# EAGLE board Meshtastic-DIY_v4_TTGO-T8-18 (EAGLE 9.6.2)
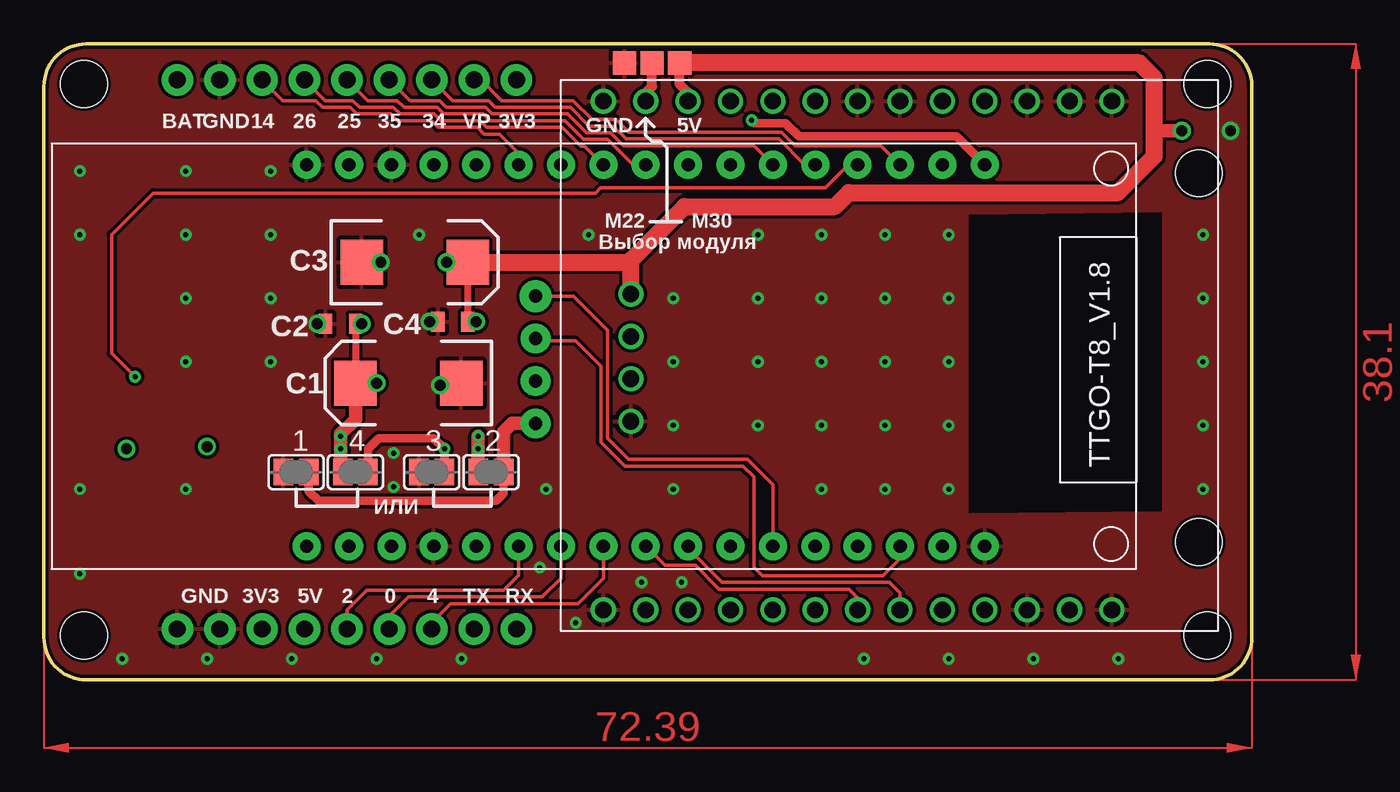
[diagram p0: board, top side]
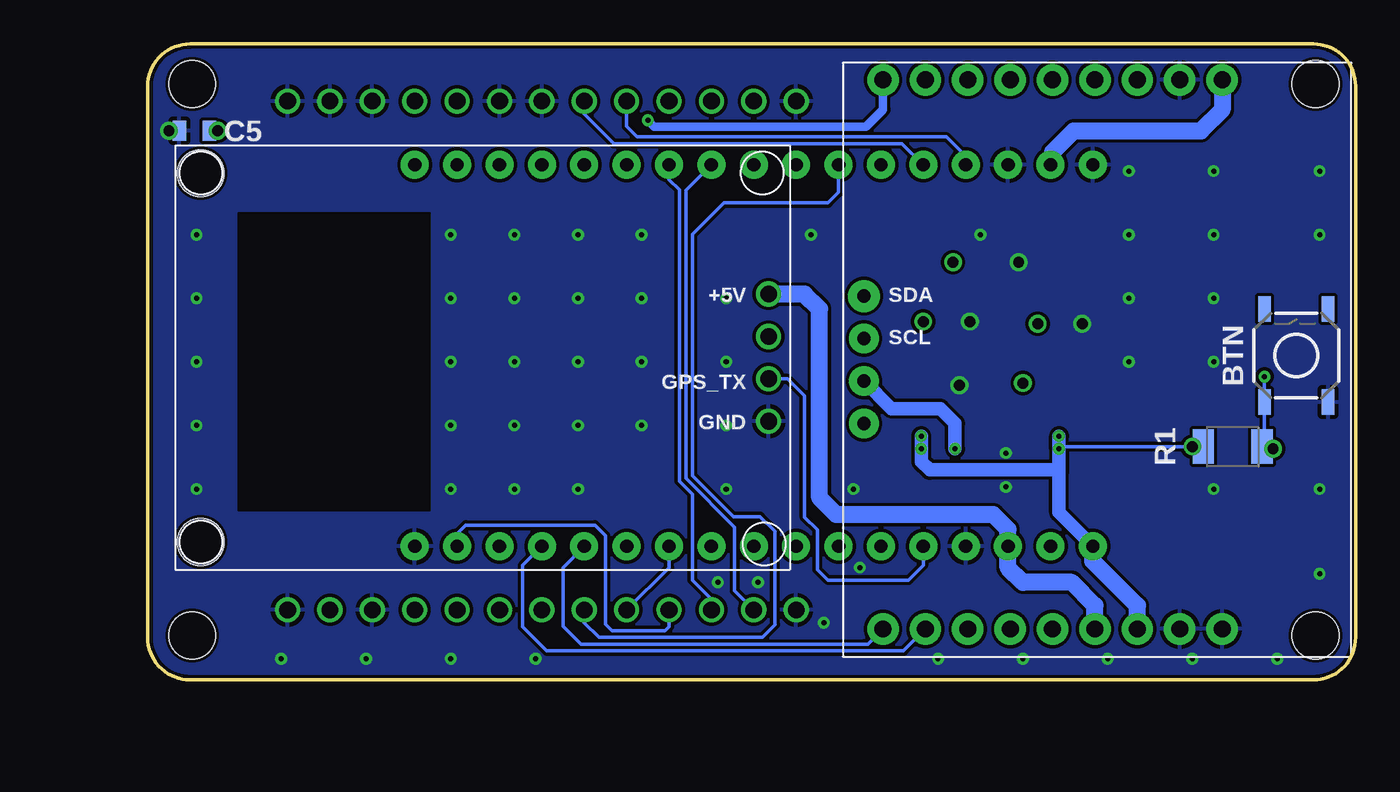
[diagram p1: board, bottom side, seen from below]

Size 72.39 x 38.1 mm. Coordinates in mm from the lower left corner, seen from the top.
Outline: 2.54,0 arc-90 0,2.54 0,35.56 arc-90 2.54,38.1 69.85,38.1 arc-90 72.39,35.56 72.39,2.54 arc-90 69.85,0 2.54,0
Copper layers (1*16): Top 0.035mm / dielectric 1.5mm / Bottom 0.035mm
Design rules "default *": minimum track width 0.2mm, minimum drill 0.25mm, track to track 0.2mm, track to pad 0.2mm, pad to pad 0.2mm, via to via 0.2mm, smd to smd 0.2mm, copper to edge 0.2mm, drill to drill 0.2mm, minimum pad ring 10mil, minimum via ring 8mil, stop-mask expansion 4mil, vias tented up to drill 0.35mm, thermal gap 10mil
Holes 2.8 mm at 69.22,8.26 69.22,30.35 69.72,35.69 69.72,2.67 2.41,35.69 2.41,2.67
tRestrict: area 55.5,10 to 66.9,27.9
bRestrict: 4 lines

## Footprints (pad centres in the part's own frame; a part is rotated, then mirrored left to right if it is on the bottom)
SJ = smd 1.168 x 1.6: 1 -0.762,0; 2 0.762,0
TACTILE_SWITCH_SMD_5.2MM = smd 1.524 x 0.762: 1 -2.794,1.905; 2 2.794,1.905; 3 -2.794,-1.905; 4 2.794,-1.905
EIA7343 = smd 2.55 x 2.7: A 3.17,0; C -3.17,0
0805 = smd 0.8 x 1.2: 1 -0.9,0; 2 0.9,0
1X09_NO_SILK = drill 1.016 pad 1.88: 1 0,0; 2 2.54,0; 3 5.08,0; 4 7.62,0; 5 10.16,0; 6 12.7,0; 7 15.24,0; 8 17.78,0; 9 20.32,0
1210 = smd 1.27 x 2.06: 1 -1.755,0; 2 1.755,0
TP14SQ = smd 1.4 x 1.4: TP 0,0
TTGO-T8_V18 = drill 0.8 pad 1.676: 0 24.13,-30.48; 2 24.13,-33.02; 3V3@1 1.27,-5.08; 3V3@2 24.13,-45.72; 4 24.13,-27.94; 5 24.13,-25.4; 5V@1 24.13,-40.64; 12 1.27,-35.56; 13 1.27,-38.1; 14 1.27,-33.02; 15 24.13,-35.56; 18 24.13,-22.86; 19 24.13,-20.32; 21 24.13,-17.78; 22 24.13,-10.16; 23 24.13,-7.62; 25 1.27,-25.4; 26 1.27,-27.94; 27 1.27,-30.48; 32 1.27,-20.32; 33 1.27,-22.86; 34 1.27,-15.24; 35 1.27,-17.78; BAT 1.27,-43.18; GND@1 1.27,-40.64; GND@2 1.27,-45.72; GND@3 24.13,-38.1; GND@4 24.13,-5.08; RST 1.27,-7.62; RXD 24.13,-15.24; TXD 24.13,-12.7; VIN 24.13,-43.18; VN 1.27,-12.7; VP 1.27,-10.16
1.3"OLED = drill 0.8 pad 1.778: GND 2.54,0; SCL 5.08,0; VCC 0,0 | drill 0.8 pad 1.9: SDA 7.62,0
E22-XXXMXXS = drill 1: P$1 -15.24,13.97; P$2 -15.24,11.43; P$3 -15.24,8.89; P$4 -15.24,6.35; P$5 -15.24,3.81; P$6 -15.24,1.27; P$7 -15.24,-1.27; P$8 -15.24,-3.81; P$9 -15.24,-6.35; P$10 -15.24,-8.89; P$11 -15.24,-11.43; P$12 -15.24,-13.97; P$13 -15.24,-16.51; P$14 15.24,-16.51; P$15 15.24,-13.97; P$16 15.24,-11.43; P$17 15.24,-8.89; P$18 15.24,-6.35; P$19 15.24,-3.81; P$20 15.24,-1.27; P$21 15.24,1.27; P$22 15.24,3.81; P$23 15.24,6.35; P$24 15.24,8.89; P$25 15.24,11.43; P$26 15.24,13.97
GPS-NEO = drill 1: P$1 -3.81,16.51; P$2 -1.27,16.51; P$3 1.27,16.51; P$4 3.81,16.51

## Placement (x,y rotation side)
1  [SJ]  15.11,12.45 0 top
2  [SJ]  26.8,12.45 0 top
3  [SJ]  23.24,12.45 0 top
4  [SJ]  18.67,12.45 0 top
BTN  MOMENTARY-SWITCH-SPST-SMD-5.2MM  [TACTILE_SWITCH_SMD_5.2MM]  3.56,19.43 90 bottom
C1  100uF  [EIA7343]  21.84,17.78 180 top
C2  100nF  [0805]  17.78,21.34 180 top
C3  100uF  [EIA7343]  22.23,25.02 0 top
C4  100nF  [0805]  24.51,21.46 180 top
C5  100nF  [0805]  69.6,32.89 180 bottom
J1  [1X09_NO_SILK]  8,3.05 0 top
J2  [1X09_NO_SILK]  8,35.94 0 top
R1  10k  [1210]  7.37,13.97 0 bottom
TP1  TPTP14SQ  [TP14SQ]  38.1,36.96 0 top
TP2  TPTP14SQ  [TP14SQ]  36.45,36.96 0 top
TP3  TPTP14SQ  [TP14SQ]  34.8,36.96 0 top
TTGO-T8_V1.8  [TTGO-T8_V18]  61.47,32.13 270 top
U$1  13"OLED13"OLED  [1.3"OLED]  29.46,15.37 90 bottom
U$2  E22-XXXMXXS  [E22-XXXMXXS]  50.04,19.43 270 top
U$3  GPS-NEO  [GPS-NEO]  51.69,19.3 270 bottom

## Library data of the parts
1-4 = jumper
BTN = SparkFun-Switches; PROD_ID: SWCH-08247; SF_SKU: COM-08720
C1 C3 = SparkFun-Capacitors; PROD_ID: CAP-07890
C2 C4 C5 = SparkFun-Capacitors; PROD_ID: CAP-08469
J1 J2 = SparkFun-Connectors
R1 = SparkFun-Resistors; PROD_ID: RES-12374
TP1-TP3 = testpad
TTGO-T8_V1.8 = TTGO-T8
U$1 U$3 = 13oled
U$2 = E22-XXXMXXS

## Nets
0: J1.6 TTGO-T8_V1.8.0
2: J1.5 TTGO-T8_V1.8.2
3V3: J2.9 TTGO-T8_V1.8.3V3@1
4: J1.7 TTGO-T8_V1.8.4
14: J2.3 TTGO-T8_V1.8.14
25: J2.5 TTGO-T8_V1.8.25
26: J2.4 TTGO-T8_V1.8.26
34: J2.7 TTGO-T8_V1.8.34
35: J2.6 TTGO-T8_V1.8.35
+3V3: 2.1 4.1 C1.A C2.1 J1.3 R1.1 TTGO-T8_V1.8.3V3@2
+5V: C3.A C4.1 C5.1 J1.4 TP1.TP TTGO-T8_V1.8.5V@1 U$2.P$11 U$3.P$1
ANT: U$2.P$25
BAT: J2.1 TTGO-T8_V1.8.BAT
BTN: BTN.1 R1.2 TTGO-T8_V1.8.VN
BUSY: TTGO-T8_V1.8.32 U$2.P$16
GND: 1.1 3.1 BTN.3 C1.C C2.2 C3.C C4.2 C5.2 J1.1 J1.2 J2.2 TP3.TP TTGO-T8_V1.8.GND@1 TTGO-T8_V1.8.GND@2 TTGO-T8_V1.8.GND@3 TTGO-T8_V1.8.GND@4 U$2.P$1 U$2.P$2 U$2.P$3 U$2.P$6 U$2.P$7 U$2.P$13 U$2.P$14 U$2.P$24 U$2.P$26 U$3.P$4
GPS_TX: TTGO-T8_V1.8.15 U$3.P$3
IRQ: TTGO-T8_V1.8.33 U$2.P$15
LCD_SCK: TTGO-T8_V1.8.22 U$1.SCL
LCD_SDA: TTGO-T8_V1.8.21 U$1.SDA
MISO: TTGO-T8_V1.8.19 U$2.P$18
MOSI: TTGO-T8_V1.8.27 U$2.P$19
N$1: U$2.P$10
N$2: 3.2 4.2 U$1.GND
N$3: U$3.P$2
N$4: 1.2 2.2 U$1.VCC
N$40: TTGO-T8_V1.8.VIN
NSS: TTGO-T8_V1.8.18 U$2.P$21
RST: TTGO-T8_V1.8.23 U$2.P$17
RST2: TTGO-T8_V1.8.RST
RXD: J1.9 TTGO-T8_V1.8.RXD
RXEN: TTGO-T8_V1.8.12 U$2.P$8
SCK: TTGO-T8_V1.8.5 U$2.P$20
TXD: J1.8 TTGO-T8_V1.8.TXD
TXEN: TTGO-T8_V1.8.13 U$2.P$9
VCC2: TP2.TP U$2.P$12
VP: J2.8 TTGO-T8_V1.8.VP

## Tracks (layer width: path | path; a pad name or v marks a point on that pad's centre or on a via)
0
  Top 0.2: TTGO-T8_V1.8.0 30.99,6.1 29.86,4.97 21.86,4.97 20.7,3.81 J1.6
2
  Top 0.2: TTGO-T8_V1.8.2 28.45,6.26 27.56,5.37 19.34,5.37 18.16,4.19 J1.5
3V3  (via drill 0.3)
  Top 0.508: v42.42,33.53 42.59,33.36 44.45,33.36 45.24,32.56 54.69,32.56 TTGO-T8_V1.8.3V3@1
  Bottom 0.508: v42.42,33.53 42.04,33.15 29.34,33.15 28.32,34.16 J2.9
4
  Top 0.2: TTGO-T8_V1.8.4 33.53,6.1 32,4.57 24.38,4.57 23.24,3.43 J1.7
14
  Top 0.2: TTGO-T8_V1.8.14 28.45,31.56 27.3,32.7 26.38,32.7 25.98,33.1 23.62,33.1 23.22,33.5 21.18,33.5 20.78,33.9 18.75,33.9 18.35,34.3 16.7,34.3 16.29,34.7 14.32,34.7 J2.3
25
  Top 0.2: TTGO-T8_V1.8.25 35.31,30.86 33.79,32.38 32.34,32.38 31.22,33.5 26.71,33.5 26.31,33.9 23.95,33.9 23.55,34.3 21.58,34.3 21.18,34.7 19.4,34.7 J2.5
26
  Top 0.2: TTGO-T8_V1.8.26 32.41,31.98 32.18,31.98 31.06,33.1 26.54,33.1 26.14,33.5 23.79,33.5 23.39,33.9 21.34,33.9 20.94,34.3 20.57,34.3 20.45,34.3 18.91,34.3 18.51,34.7 16.86,34.7 J2.4
34
  Top 0.2: TTGO-T8_V1.8.34 45.59,30.86 44.05,32.4 34.89,32.4 34.12,33.18 32.67,33.18 31.55,34.3 27.04,34.3 26.64,34.7 24.5,34.7 23.27,35.94 J2.7
35
  Top 0.2: TTGO-T8_V1.8.35 42.55,32 34.73,32 34.06,32.67 33.95,32.78 32.51,32.78 31.39,33.9 26.87,33.9 26.47,34.3 24.12,34.3 23.72,34.7 21.94,34.7 J2.6
+3V3  (via drill 0.3, 0.65)
  Top 0.254: v19.94,17.78 18.69,17.78 C1.A | C2.1 v19.05,21.34
  Top 0.406: C2.1 C1.A
  Top 0.813: 4.1 17.78,12.57 v17.78,14.61 17.78,14.73 18.67,15.63 C1.A | 2.1 v26.04,13.84 v26.04,14.61
  Bottom 0.2: R1.1 v9.78,13.97 17.65,13.97 v17.78,13.84
  Bottom 0.813: TTGO-T8_V1.8.3V3@2 17.78,10.03 17.78,12.45 | v17.78,14.61 v17.78,13.84 17.78,12.45 | 17.78,12.45 17.91,12.57 25.53,12.57 26.04,13.08 v26.04,14.61
  Bottom 1.016: J1.3 13.08,4.45 15.75,7.11 TTGO-T8_V1.8.3V3@2
+5V  (via drill 0.65)
  Top 0.254: v24.13,25.02 C3.A | v25.91,21.46 C4.1
  Top 0.406: C4.1 25.41,25 C3.A
  Top 0.61: U$2.P$11 38.61,35.18 38.1,35.69 TP1.TP
  Top 0.813: C3.A 25.52,25.15 | v68.2,32.89 66.55,32.89
  Top 1.016: U$3.P$1 35.18,25.15 | TP1.TP 65.66,36.96 66.55,36.07 66.55,32.89 66.55,31.37 64.37,29.19 48.24,29.19 47.41,28.36 38.39,28.36 35.18,25.15 | C3.A 35.05,25.02 35.18,25.15
  Bottom 0.2: v68.2,32.89 C5.1
  Bottom 1.016: U$3.P$1 33.02,23.11 32.13,22.23 32.13,10.92 31.11,9.91 21.72,9.91 20.83,9.02 TTGO-T8_V1.8.5V@1 20.83,6.73 19.94,5.84 17.02,5.84 15.62,4.45 J1.4
BAT
  Bottom 1.016: TTGO-T8_V1.8.BAT 18.16,30.99 18.16,31.62 16.89,32.89 9.27,32.89 8,34.16 J2.1
BTN  (via drill 0.3, 0.65)
  Top 0.2: v5.46,18.16 4.06,19.56 4.06,26.67 6.56,29.16 33.06,29.16 33.36,29.47 46.83,29.47 48.22,30.86 TTGO-T8_V1.8.VN
  Bottom 0.2: v5.46,18.16 BTN.1 5.46,14.12 R1.2 5.08,13.97 v4.95,13.84
BUSY
  Bottom 0.2: U$2.P$16 38.61,4.83 39.75,5.97 39.75,11.12 40.53,11.9 40.53,29.36 41.15,29.97 TTGO-T8_V1.8.32
GND  (via drill 0.3, 0.65)
  Top 0.254: v23.11,21.46 C4.2 | C1.C 23.88,17.78 v23.75,17.65 | v16.38,21.34 C2.2 | C3.C v20.19,25.02
  Bottom 0.254: v71.12,32.89 C5.2
  other vias: 20.95,11.56 20.95,13.59 31.88,3.43 54.23,26.67 50.42,26.67 46.61,26.67 42.8,26.67 42.8,22.86 46.61,22.86 50.42,22.86 54.23,22.86 42.8,19.05 42.8,15.24 46.61,15.24 46.61,19.05 50.42,19.05 50.42,15.24 54.23,15.24 54.23,19.05 46.61,11.43 50.42,11.43 54.23,11.43 37.72,22.86 37.72,19.05 37.72,15.24 32.64,26.67 22.48,26.67 13.59,26.67 8.51,26.67 2.16,26.67 2.16,30.48 8.51,30.48 13.59,30.48 8.51,22.86 8.51,19.05 13.59,19.05 13.59,22.86 8.51,11.43 2.16,11.43 2.16,6.35 37.72,11.43 30.1,11.43 54.23,1.27 59.31,1.27 64.39,1.27 49.15,1.27 25.02,1.27 19.94,1.27 14.86,1.27 9.78,1.27 4.7,1.27 69.47,26.67 69.47,22.86 69.47,19.05 69.47,15.24 69.47,11.43 38.23,5.84 35.81,5.84 29.72,6.73
  pour Top: -0.38,38.35 -0.38,-0.64 72.9,-0.64 72.9,38.35
  pour Bottom: -0.76,38.61 -0.76,-0.38 73.15,-0.38 73.15,38.61
GPS_TX
  Bottom 0.2: TTGO-T8_V1.8.15 25.91,6.86 26.8,5.97 31.62,5.97 32.26,6.61 32.26,8.98 33.02,9.74 33.02,17.02 34.04,18.03 U$3.P$3
IRQ
  Bottom 0.2: TTGO-T8_V1.8.33 40.13,29.34 40.13,12.06 37.21,9.14 37.21,5.33 U$2.P$15
LCD_SCK
  Top 0.2: TTGO-T8_V1.8.22 51.31,7.26 50.29,6.24 43.05,6.24 42.55,6.75 42.55,12.17 41.91,12.81 34.82,12.81 33.38,14.24 33.38,18.8 31.86,20.32 29.59,20.32 U$1.SCL
LCD_SDA
  Top 0.2: U$1.SDA 31.75,22.99 33.78,20.95 33.78,14.48 35.05,13.21 42.16,13.21 43.69,11.68 TTGO-T8_V1.8.21
MISO
  Bottom 0.2: U$2.P$18 41.15,6.73 TTGO-T8_V1.8.19
MOSI
  Bottom 0.2: U$2.P$19 46.23,3.43 45.34,2.54 35.56,2.54 34.8,3.3 34.8,8.89 35.69,9.78 37.28,9.78 39.73,12.23 39.73,26.69 37.85,28.57 31.62,28.57 30.99,29.21 TTGO-T8_V1.8.27
N$2  (via drill 0.3)
  Top 0.508: 4.2 19.43,13.84 20.07,14.48 23.37,14.48 v24,13.84 3.2
  Bottom 0.813: v24,13.84 24,15.37 24.89,16.26 27.81,16.26 U$1.GND
N$4
  Top 0.508: 1.2 15.88,11.3 16.46,10.72 27.11,10.72 27.56,11.18 2.2
  Top 0.813: 2.2 27.56,14.86 28.07,15.37 U$1.VCC
NSS
  Top 0.2: U$2.P$21 51.31,5.21 50.67,5.84 40.64,5.84 38.61,7.87 TTGO-T8_V1.8.18
RST
  Bottom 0.2: U$2.P$17 41.15,3.19 41.4,2.94 44.58,2.94 44.96,3.32 44.96,8.64 45.59,9.27 53.34,9.27 53.85,8.76 TTGO-T8_V1.8.23
RXD
  Bottom 0.2: TTGO-T8_V1.8.RXD 47.5,6.73 47.5,3.21 46.43,2.14 29.46,2.14 29.36,2.14 29.23,2.14 J1.9
RXEN
  Bottom 0.2: U$2.P$8 46.23,33.91 44.45,32.13 30.99,32.13 30.48,32.13 27.18,32.13 TTGO-T8_V1.8.12
SCK
  Top 0.2: U$2.P$20 48.77,4.93 48.26,5.44 40.47,5.44 39.06,6.86 37.21,6.86 TTGO-T8_V1.8.5
TXD
  Bottom 0.2: TTGO-T8_V1.8.TXD 49.91,6.86 49.91,3.17 48.48,1.74 27.09,1.74 J1.8
TXEN
  Bottom 0.2: U$2.P$9 43.69,33.17 43.05,32.53 24.53,32.53 23.37,31.37 TTGO-T8_V1.8.13
VCC2
  Top 0.61: U$2.P$12 36.07,35.18 36.45,35.56 TP2.TP
VP
  Top 0.2: TTGO-T8_V1.8.VP 50.16,32 45.02,32 44.22,32.8 35.06,32.8 34.28,33.58 32.84,33.58 31.72,34.7 27.43,34.7 26.19,35.94 J2.8
(copper drawn outside any net)
  shapes: Top area x2

## Text on the board
tNames: BAT | GND | 14 | 26 | 25 | 35 | 34 | VP | 3V3 | GND | 5V | М22 | М30 | Выбор модуля | ИЛИ | GND | 3V3 | 5V | 2 | 0 | 4 | TX | RX
bNames: +5V | SDA | SCL | GPS_TX | GND